# Altium PCB USB Host.PcbDoc
Units mil, origin at the board's own origin, x right, y up, seen from the top; angles counter-clockwise.
Board outline not stored, 4 copper layers (Top Layer, Internal Plane 2, Internal Plane 1, Bottom Layer); 8 components, 0 nets, 27 pads, 5 vias.
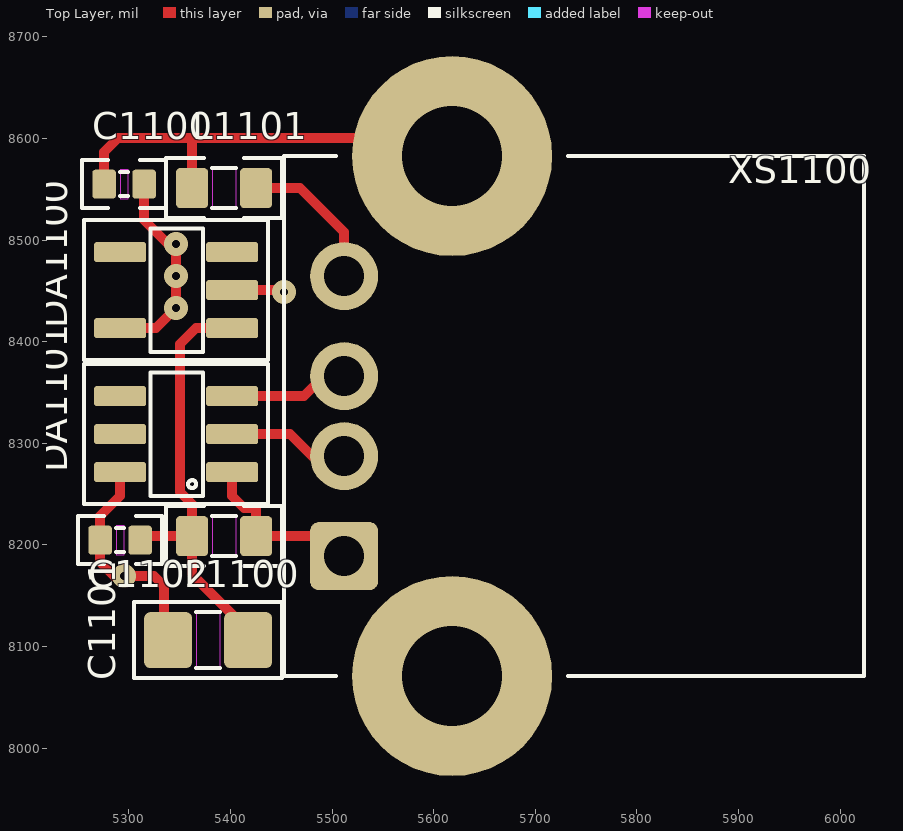
[diagram p0: Top Layer view]
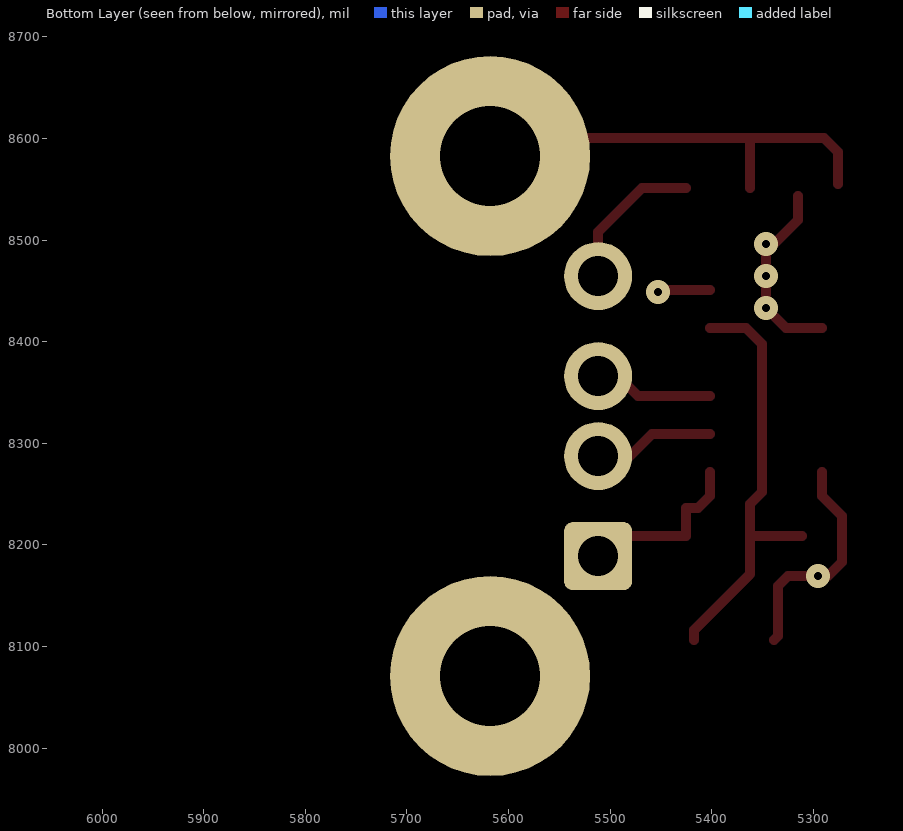
[diagram p1: Bottom Layer view, seen from below]
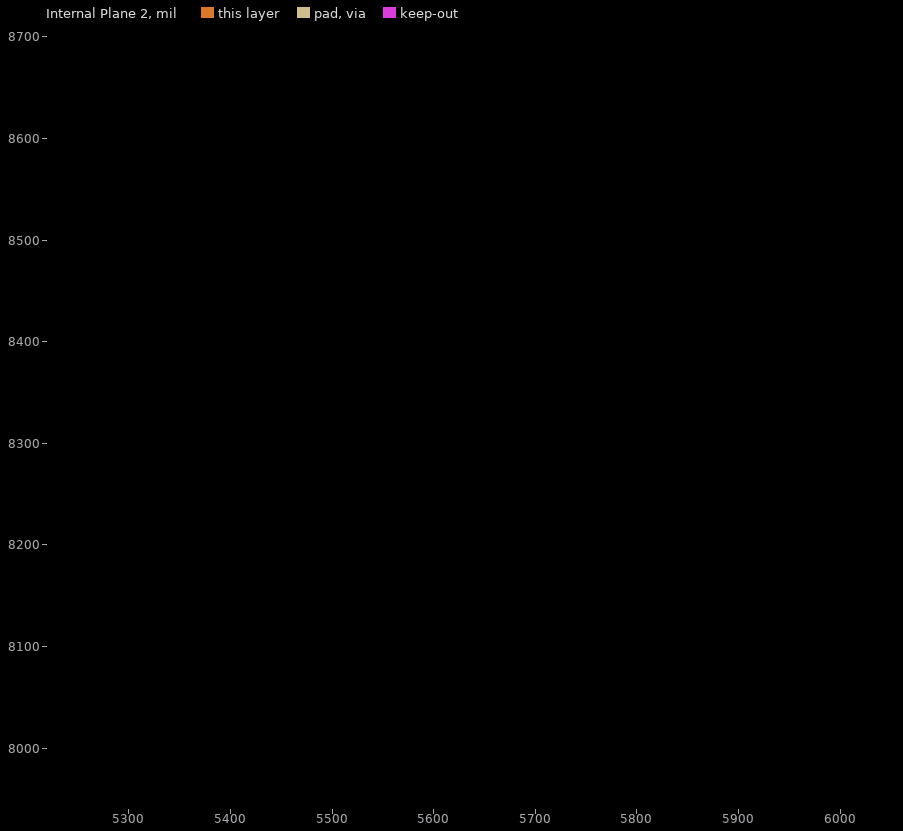
[diagram p2: Internal Plane 2, clearances drawn from the general rule]
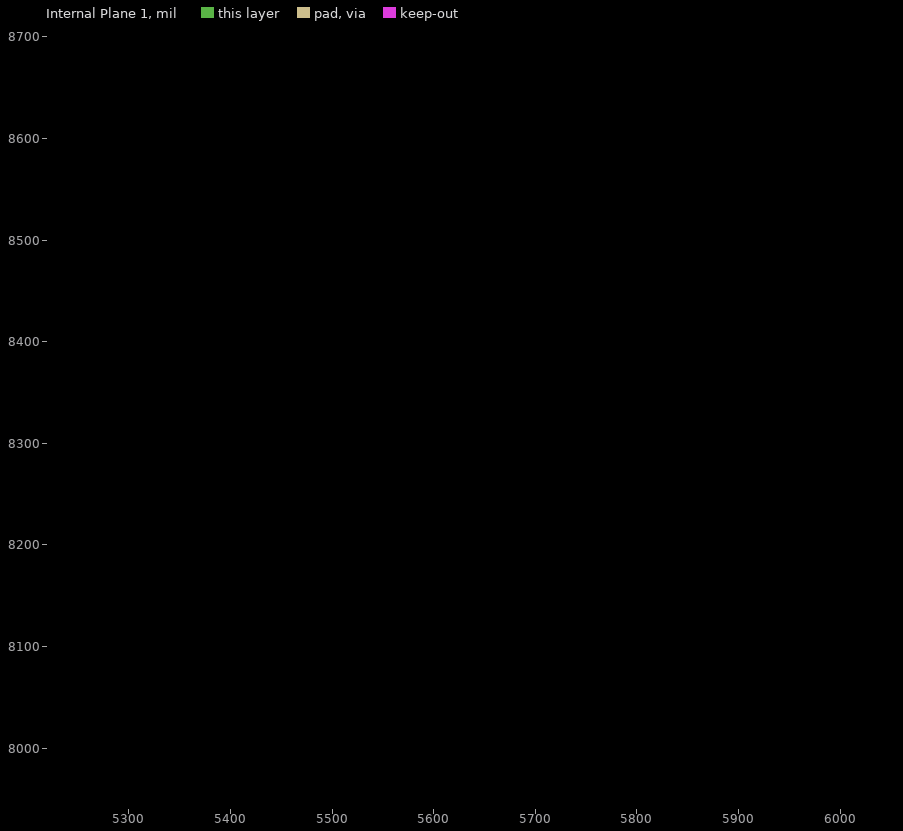
[diagram p3: Internal Plane 1, clearances drawn from the general rule]

## Layer stack, top to bottom
Top Solder: solder mask 0.4, Solder Resist, Dk 3.5
Top Layer: signal copper 1.4
Dielectric 1: dielectric 12.6, FR-4, Dk 4.8
Internal Plane 2: plane copper 1.4
Dielectric2: dielectric 12.6, FR-4, Dk 4.8
Internal Plane 1: plane copper 1.4
Dielectric3: dielectric 12.6, FR-4, Dk 4.8
Bottom Layer: signal copper 1.4
Bottom Solder: solder mask 0.4, Solder Resist, Dk 3.5

## Design rules (kind name [scope] priority, off if disabled: settings)
RoomDefinition "USB Host" [InComponentClass('Components Class 1')] p1: confinementstyle=ConfineIn formatcopy=TRUE lockcomponents=TRUE outline 5236.22,8700.79 6062.99,8700.79 6062.99,7952.76 5236.22,7952.76

## Components (designator, comment, footprint, x,y, rotation, side; value= is the part's Value field where it differs from the comment)
C1100 "0,1" CAP0402 5295.28,8555.12 r180 top
C1101 "22,0" CAP0805 5377.95,8106.3 r180 top
C1102 "0,1" CAP0402 5291.34,8204.72 r180 top
DA1100 "TPS2041B" SOT23-5 5405.51,8413.39 r180 top
DA1101 "STF202-22T1G" SOT23-6 5405.51,8271.65 r180 top
L1100 "BLM18PG471" FB0603 5393.7,8208.66 r0 top
L1101 "BLM18PG471" FB0603 5393.7,8551.18 r0 top
XS1100 "USB" "USB-A 1J" 5511.81,8188.98 r270 top

## Footprints (in the part's own frame and the unit in brackets; to place one, negate y for a bottom-side part, rotate by r counter-clockwise, add the part's x,y. Pads: shape width x height; smd on the part's side, far side on the other; paste and mask are expansions set on the pad)
CAP0402 [mm]
  rrect25% 0.59x0.72 smd: 1(-0.5,0) 2(0.5,0)
  Top Layer keep-out region: -0.1,0.36 -0.1,-0.36 0.1,-0.36 0.1,0.36
  silkscreen extent -1.05,-0.6 1.05,0.6, body extent -0.5,-0.25 0.5,0.25, height 0.49
CAP0805 [mm]
  rrect25% 1.2x1.4 smd: 1(-1,0) 2(1,0)
  Top Layer keep-out region: -0.3,-0.7 0.3,-0.7 0.3,0.7 -0.3,0.7
  silkscreen extent -1.85,-0.95 1.85,0.95, body extent -1,-0.62 1,0.63, height 1
FB0603 [mm]
  rrect25% 0.8x1 smd: 1(-0.8,0) 2(0.8,0)
  Top Layer keep-out region: -0.3,0.5 -0.3,-0.5 0.3,-0.5 0.3,0.5
  silkscreen extent -1.45,-0.75 1.45,0.75, body extent -0.8,-0.4 0.8,0.4, height 0.65
SOT23-5 [mm]
  rrect25% 1.3x0.5 smd mask+0.05: 1(0.1,0) 2(0.1,-0.95) 3(0.1,-1.9) 4(2.9,-1.9) 5(2.9,0)
  silkscreen extent -0.8,-2.7 3.8,0.8, body extent 0,-2.45 3,0.55, height 1.45
SOT23-6 [mm]
  rrect25% 1.3x0.5 smd mask+0.05: 1(0.1,0) 2(0.1,-0.95) 3(0.1,-1.9) 4(2.9,-1.9) 5(2.9,-0.95) 6(2.9,0)
  silkscreen extent -0.8,-2.7 3.8,0.8, body extent -0.02,-2.49 2.98,0.55, height 1.4
"USB-A 1J" [mm]
  round 5 hole 2.5: 0(-10,2.7) 0(3,2.7)
  rrect25% 1.7x1.7 hole 1: 1(0,0)
  round 1.7 hole 1: 2(-2.5,0) 3(-4.5,0) 4(-7,0)
  silkscreen extent -10,-1.5 3,13, body extent -10.68,-1.02 3.82,12.98, height 7.64

## Part data
C1100 C1102: library part CAP_0402, "Конденсатор чип"
C1101: library part CAP_0805, "Конденсатор чип"
DA1100: "Интерфейс USB контроллер питания"
DA1101: "Интерфейс USB защита+фильтр"
L1100 L1101: library part BLM18PG, "Ферритовая бусина"
XS1100: library part "USB 1J", "Разъем USB"

## Via types
v1: diameter 23.62, hole 7.87, Top Layer to Bottom Layer, tented both sides, 5 vias

## Nets (pads, with @x,y where several pads share a name; then routed paths per layer and width w, separated by ;. In a path a pad name is that pad's centre, name@x,y a point inside that pad or via, vN(x,y) a via of type N, cw(c..) or ccw(c..) an arc to the next point about the centre after c; other vN are vias at no path point)
pads on no net: C1100.1 C1100.2 C1101.1 C1101.2 C1102.1 C1102.2 DA1100.1 DA1100.2 DA1100.3 DA1100.4 DA1100.5 DA1101.1 DA1101.2 DA1101.3 DA1101.4 DA1101.5 DA1101.6 L1100.1 L1100.2 L1101.1 L1101.2 XS1100.0 XS1100.1 XS1100.2 XS1100.3 XS1100.4
copper on no net: | length 1888.8
  Top Layer w9.84: 5275.59,8555.12 5275.59,8586.61 5289.37,8600.39 5362.2,8600.39 ; 5291.34,8271.65 5291.34,8248.03 5271.65,8228.35 5271.65,8183.07 5285.43,8169.29 5324.8,8169.29 5334.65,8159.45 5334.65,8110.24 5338.58,8106.3 ; 5291.34,8413.39 5326.77,8413.39 v1(5346.46,8433.07) v1(5346.46,8464.57) v1(5346.46,8496.06) 5338.58,8496.06 5314.96,8519.68 5314.96,8543.31 ; 5311.02,8208.66 5362.2,8208.66 ; 5362.2,8551.18 5362.2,8600.39 ; 5401.57,8271.65 5401.57,8248.03 5413.39,8236.22 5425.2,8236.22 5425.2,8208.66 5492.13,8208.66 5511.81,8188.98 ; 5401.57,8309.06 5458.66,8309.06 5480.31,8287.4 5511.81,8287.4 ; 5401.57,8346.46 5472.44,8346.46 5492.13,8366.14 5511.81,8366.14 ; 5401.57,8413.39 5366.14,8413.39 5350.39,8397.64 5350.39,8251.97 5362.2,8240.16 5362.2,8208.66 ; 5401.57,8450.79 5435.04,8450.79 v1@5450.79,8450.79 ; 5417.32,8106.3 5417.32,8116.04 5362.2,8171.16 5362.2,8208.66 ; 5425.2,8551.18 5468.5,8551.18 5511.81,8507.87 5511.81,8464.57 ; 5618.11,8582.68 5600.39,8600.39 5362.2,8600.39
  other v1: 5295.28,8169.29 5452.76,8448.82

## Other copper
Internal Plane 1 (plane layer: these items are gaps in the copper):
  lines w19.68: 5275.59,8031.5 6023.62,8031.5 6023.62,8622.05 5275.59,8622.05 5275.59,8031.5
Internal Plane 2 (plane layer: these items are gaps in the copper):
  lines w19.68: 5275.59,8031.5 6023.62,8031.5 6023.62,8622.05 5275.59,8622.05 5275.59,8031.5